# EAGLE board CT_schematic (EAGLE 7.6.0)

Size 100 x 80 mm. Coordinates in mm from the lower left corner, seen from the top.
Outline: 0,0 100,0 100,80 0,80 0,0
Copper layers (1*16): Top 0.035mm / dielectric 1.5mm / Bottom 0.035mm
Design rules "default": minimum track width 10mil, minimum drill 24mil, track to track 8mil, track to pad 8mil, pad to pad 8mil, via to via 8mil, smd to smd 8mil, copper to edge 40mil, drill to drill 8mil, minimum pad ring 10mil, minimum via ring 8mil, stop-mask expansion 4mil, vias tented up to drill 0mil, thermal gap 10mil

## Footprints (pad centres in the part's own frame; a part is rotated, then mirrored left to right if it is on the bottom)
C0603 = smd 0.8 x 0.8: 1 -0.762,0; 2 0.762,0
C0402 = smd 0.5 x 0.5: 1 -0.508,0; 2 0.508,0
C0805 = smd 1.2 x 1.3: 1 -1.016,0; 2 1.016,0
C1206 = smd 1.3 x 1.6: 1 -1.524,0; 2 1.524,0
L0603 = smd 0.8 x 0.8: 1 -0.762,0; 2 0.762,0
L0806 = smd 1.016 x 1.524: 1 -0.889,0; 2 0.889,0
R0603 = smd 0.8 x 0.8: 1 -0.762,0; 2 0.762,0
UFQFPN32 = smd 0.6 x 0.3: 1 -2.35,1.75; 2 -2.35,1.25; 3 -2.35,0.75; 4 -2.35,0.25; 5 -2.35,-0.25; 6 -2.35,-0.75; 7 -2.35,-1.25; 8 -2.35,-1.75; 17 2.35,-1.75; 18 2.35,-1.25; 19 2.35,-0.75; 20 2.35,-0.25; 21 2.35,0.25; 22 2.35,0.75; 23 2.35,1.25; 24 2.35,1.75 | smd 0.3 x 0.6: 9 -1.75,-2.35; 10 -1.25,-2.35; 11 -0.75,-2.35; 12 -0.25,-2.35; 13 0.25,-2.35; 14 0.75,-2.35; 15 1.25,-2.35; 16 1.75,-2.35; 25 1.75,2.35; 26 1.25,2.35; 27 0.75,2.35; 28 0.25,2.35; 29 -0.25,2.35; 30 -0.75,2.35; 31 -1.25,2.35; 32 -1.75,2.35 | smd 3.45 x 3.45: EPAD 0,0
LGA-14 = smd 0.675 x 0.25: 1 -1.262,0.75; 2 -1.262,0.25; 3 -1.262,-0.25; 4 -1.262,-0.75; 8 1.262,-0.75; 9 1.262,-0.25; 10 1.262,0.25; 11 1.262,0.75 | smd 0.25 x 0.675: 5 -0.5,-1.012; 6 0,-1.012; 7 0.5,-1.012; 12 0.5,1.012; 13 0,1.012; 14 -0.5,1.012
ASFL1 = smd 1.7 x 1.5: 1 -1.27,-1.1; 2 1.27,-1.1; 3 1.27,1.1; 4 -1.27,1.1
TSOT-23-5 = smd 1.3 x 0.62: 1 -1.31,0.95; 2 -1.31,0; 3 -1.31,-0.95; 4 1.31,-0.95; 5 1.31,0.95
DFN8_2X3MC = smd 0.813 x 0.305: 1 -1.398,0.75; 2 -1.398,0.25; 3 -1.398,-0.25; 4 -1.398,-0.75; 5 1.398,-0.75; 6 1.398,-0.25; 7 1.398,0.25; 8 1.398,0.75 | smd 1.753 x 1.549: 9 0,0
JST-2-SMD = smd 1 x 4.6: 1 -1,-3.7; 2 1,-3.7 | smd 1.6 x 3.4: NC1 -3.4,1.5; NC2 3.4,1.5
FCI_10118193-0001LF = smd 0.4 x 1.35: 1 -1.3,2.675; 2 -0.65,2.675; 3 0,2.675; 4 0.65,2.675; 5 1.3,2.675 | smd 1.6 x 1.4: 6 -3.2,2.45; 7 3.2,2.45 | smd 1.9 x 1.9: 8 -1.2,0; 9 1.2,0 | hole 0.5: -3.3,0; 3.3,0
SON-6 = smd 0.55 x 0.3: 1 -0.355,0.5 | smd 0.52 x 0.3: 2 -0.37,0; 3 -0.37,-0.5; 4 0.37,-0.5; 5 0.37,0; 6 0.37,0.5
SW_4-1437565-2 = smd 1.4 x 2.1: 1 -2.23,4.55; 2 -2.23,-4.55; 3 2.23,4.55; 4 2.23,-4.55
LGM67K-G1J2-24-Z = smd 0.8 x 1.4: A -2,0; C 0,0
NC7SZ125M5X = smd 1.3 x 0.7: 1 -1.3,0.95; 2 -1.3,0; 3 -1.3,-0.95; 4 1.3,-0.95; 5 1.3,0.95
DUMMY_PACKAGE_99 = drill 0.3: 1 0,-1; 2 1.5,-1; 3 3,-1

## Placement (x,y rotation side)
C1  1e-07  [C0603]  -53.34,38.1 0 top  (outside the outline)
C2  1e-07  [C0603]  -15.24,43.18 0 top  (outside the outline)
C3  4.7e-06  [C0603]  -49.53,38.1 0 top  (outside the outline)
C4  1e-08  [C0603]  -19.05,43.18 0 top  (outside the outline)
C5  1e-08  [C0603]  -22.86,43.18 0 top  (outside the outline)
C6  1e-06  [C0603]  -26.67,43.18 0 top  (outside the outline)
C7  1e-07  [C0402]  -19.05,48.26 0 top  (outside the outline)
C8  1e-07  [C0402]  -22.86,48.26 0 top  (outside the outline)
C9  1e-08  [C0402]  -26.67,48.26 0 top  (outside the outline)
C10  1e-05  [C0805]  -21.59,33.02 0 top  (outside the outline)
C11  1e-05  [C0805]  -26.67,33.02 0 top  (outside the outline)
C12  1e-07  [C0402]  -30.48,48.26 0 top  (outside the outline)
C13  1e-05  [C1206]  -36.83,25.4 0 top  (outside the outline)
C14  1e-05  [C1206]  -43.18,25.4 0 top  (outside the outline)
C15  1e-08  [C0402]  -34.29,48.26 0 top  (outside the outline)
F1  240.0  [L0603]  -30.48,43.18 0 top  (outside the outline)
I1  3.3e-06  [L0806]  -49.53,25.4 0 top  (outside the outline)
R1  10000.0  [R0603]  -20.32,38.1 0 top  (outside the outline)
R2  1000.0  [R0603]  -34.29,43.18 0 top  (outside the outline)
R3  1600.5  [R0603]  -38.1,43.18 0 top  (outside the outline)
R4  4700.0  [R0603]  -41.91,43.18 0 top  (outside the outline)
R5  2200.0  [R0603]  -45.72,43.18 0 top  (outside the outline)
R6  2200.0  [R0603]  -49.53,43.18 0 top  (outside the outline)
R7  10000.0  [R0603]  -25.4,38.1 0 top  (outside the outline)
R8  10000.0  [R0603]  -30.48,38.1 0 top  (outside the outline)
R9  220000.0  [R0603]  -44.45,33.02 0 top  (outside the outline)
R10  1000000.0  [R0603]  -39.37,33.02 0 top  (outside the outline)
R11  10000.0  [R0603]  -35.56,38.1 0 top  (outside the outline)
R12  10000.0  [R0603]  -40.64,38.1 0 top  (outside the outline)
R13  9100.0  [R0603]  -53.34,43.18 0 top  (outside the outline)
R14  680000.0  [R0603]  -49.53,33.02 0 top  (outside the outline)
R15  120000.0  [R0603]  -15.24,38.1 0 top  (outside the outline)
R16  2000.0  [R0603]  -15.24,48.26 0 top  (outside the outline)
R17  10000.0  [R0603]  -45.72,38.1 0 top  (outside the outline)
U1  stm32f051k4u7  [UFQFPN32]  -22.86,17.78 0 top  (outside the outline)
U2  BMG250  [LGA-14]  -17.78,26.67 0 top  (outside the outline)
U3  ASFL1-25MHZ-NCS  [ASFL1]  -40.64,16.51 0 top  (outside the outline)
U4  ltc3406es5  [TSOT-23-5]  -31.75,31.75 0 top  (outside the outline)
U5  MCP73831T-2ACI/MC  [DFN8_2X3MC]  -49.53,46.99 0 top  (outside the outline)
U6  S2B-PH-SM4-TB(LF)(SN)  [JST-2-SMD]  -41.91,6.35 0 top  (outside the outline)
U7  10118193-0001LF  [FCI_10118193-0001LF]  -49.53,16.51 0 top  (outside the outline)
U8  TPS3895ADRYR  [SON-6]  -43.18,46.99 0 top  (outside the outline)
U9  4-1437565-2  [SW_4-1437565-2]  -27.94,6.35 0 top  (outside the outline)
U10  Q65110A2395  [LGM67K-G1J2-24-Z]  -25.4,26.67 0 top  (outside the outline)
U11  nc7sz125m5x  [NC7SZ125M5X]  -15.24,31.75 0 top  (outside the outline)
U12  Dummy  [DUMMY_PACKAGE_99]  -40.64,48.26 0 top  (outside the outline)

## Library data of the parts
C1-C15 F1 I1 R1-R17 U1-U12 = circuit_tree

## Nets
CLK_U1_2: U1.2 U3.3
GND: C1.2 C2.2 C3.2 C4.2 C5.2 C6.2 C7.2 C8.2 C9.2 C10.2 C11.1 C11.2 C12.2 C13.2 C14.2 C15.2 R2.2 R7.2 R9.2 R13.2 R15.2 R16.2 U1.EPAD U2.1 U2.6 U2.7 U3.2 U4.2 U5.6 U5.9 U6.2 U7.5 U7.6 U7.7 U7.8 U7.9 U8.2 U10.C U11.1 U11.3 U12.1
INPUT_USBPOWER_5V: C13.1 R17.2 U5.1 U5.2 U7.1
NET_U1_4: R4.1 U1.4 U11.4
NET_U1_5: C4.1 C5.1 C6.1 F1.1 U1.5
NET_U1_28: R3.1 U1.28 U10.A
NET_U1_29: R5.1 U1.29 U2.13
NET_U1_30: R6.1 U1.30 U2.14
NET_U1_31: R7.1 U1.31
NET_U1_32: R1.1 U1.32 U9.3 U9.4
NET_U2_12: R8.1 U2.12
NET_U4_1: U4.1
NET_U4_3: I1.1 U4.3
NET_U4_5: R9.1 R10.1 U4.5
NET_U4_ATNET_3: I1.2 R10.2
NET_U5_5: R17.1 U5.5
NET_U5_8: R16.1 U5.8
NET_U8_1: R12.1 R13.1 U8.1
NET_U8_3: R14.2 R15.1 U8.3
NET_U8_4: R11.1 U8.4 U11.2
NET_U9_1: R2.1 U9.1 U9.2
PROC_GPIO_TO_U2_INT1: U1.3 U2.4
PROC_PA0: U1.6 U12.2
PROC_PA1: U1.7 U12.3
VCC_S1_3V7: C10.1 C14.1 U4.4 U5.3 U5.4 U6.1
VCC_TIER1_3V3: C1.1 C2.1 C3.1 C7.1 C8.1 C9.1 C11.2 C12.1 C15.1 F1.2 I1.2 R1.2 R3.2 R4.2 R5.2 R6.2 R8.2 R10.2 R11.2 R12.2 R14.1 U1.1 U1.17 U2.5 U2.8 U3.4 U8.6 U11.5

## Tracks (layer width: path | path; a pad name or v marks a point on that pad's centre or on a via)
CLK_U1_2  (1 unrouted)
GND  (40 unrouted)
INPUT_USBPOWER_5V  (4 unrouted)
NET_U1_4  (2 unrouted)
NET_U1_5  (4 unrouted)
NET_U1_28  (2 unrouted)
NET_U1_29  (2 unrouted)
NET_U1_30  (2 unrouted)
NET_U1_31  (1 unrouted)
NET_U1_32  (3 unrouted)
NET_U2_12  (1 unrouted)
NET_U4_3  (1 unrouted)
NET_U4_5  (2 unrouted)
NET_U4_ATNET_3  (1 unrouted)
NET_U5_5  (1 unrouted)
NET_U5_8  (1 unrouted)
NET_U8_1  (2 unrouted)
NET_U8_3  (2 unrouted)
NET_U8_4  (2 unrouted)
NET_U9_1  (2 unrouted)
PROC_GPIO_TO_U2_INT1  (1 unrouted)
PROC_PA0  (1 unrouted)
PROC_PA1  (1 unrouted)
VCC_S1_3V7  (5 unrouted)
VCC_TIER1_3V3  (27 unrouted)